# EAGLE board ELE-T305 (EAGLE 4.16)
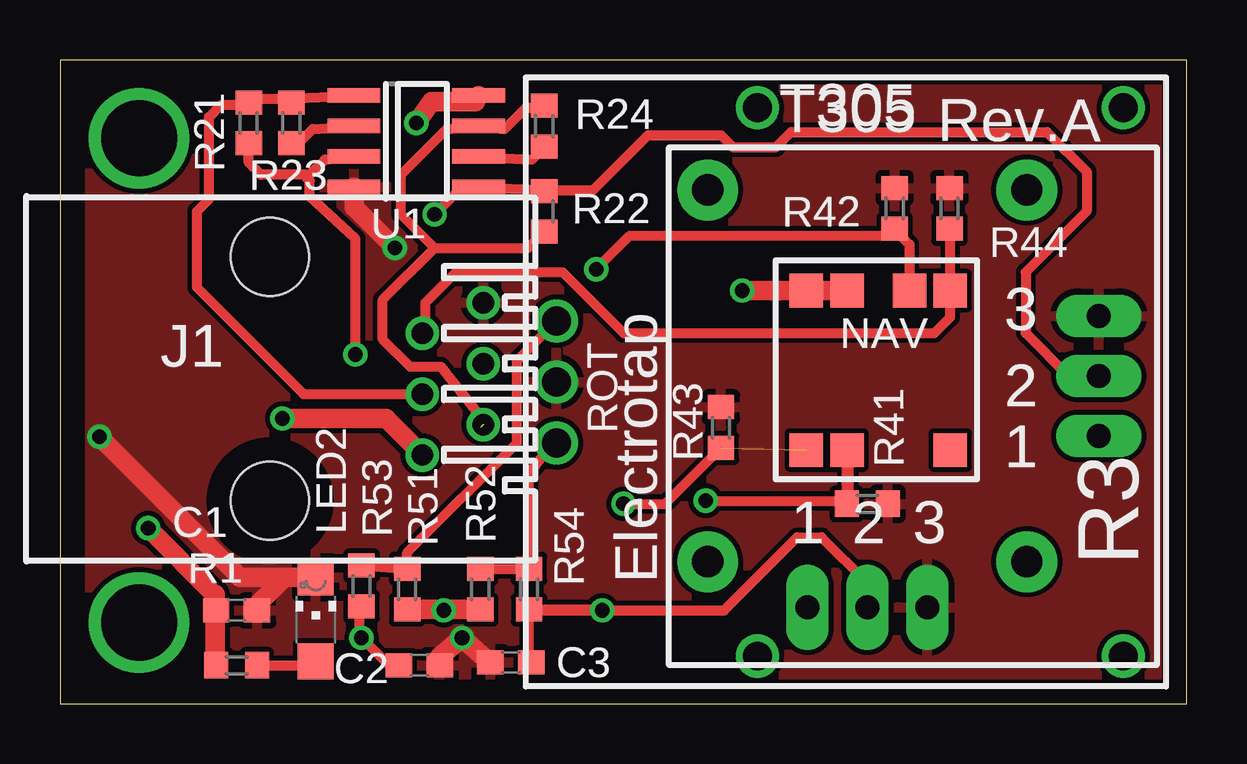
[diagram p0: board, top side]
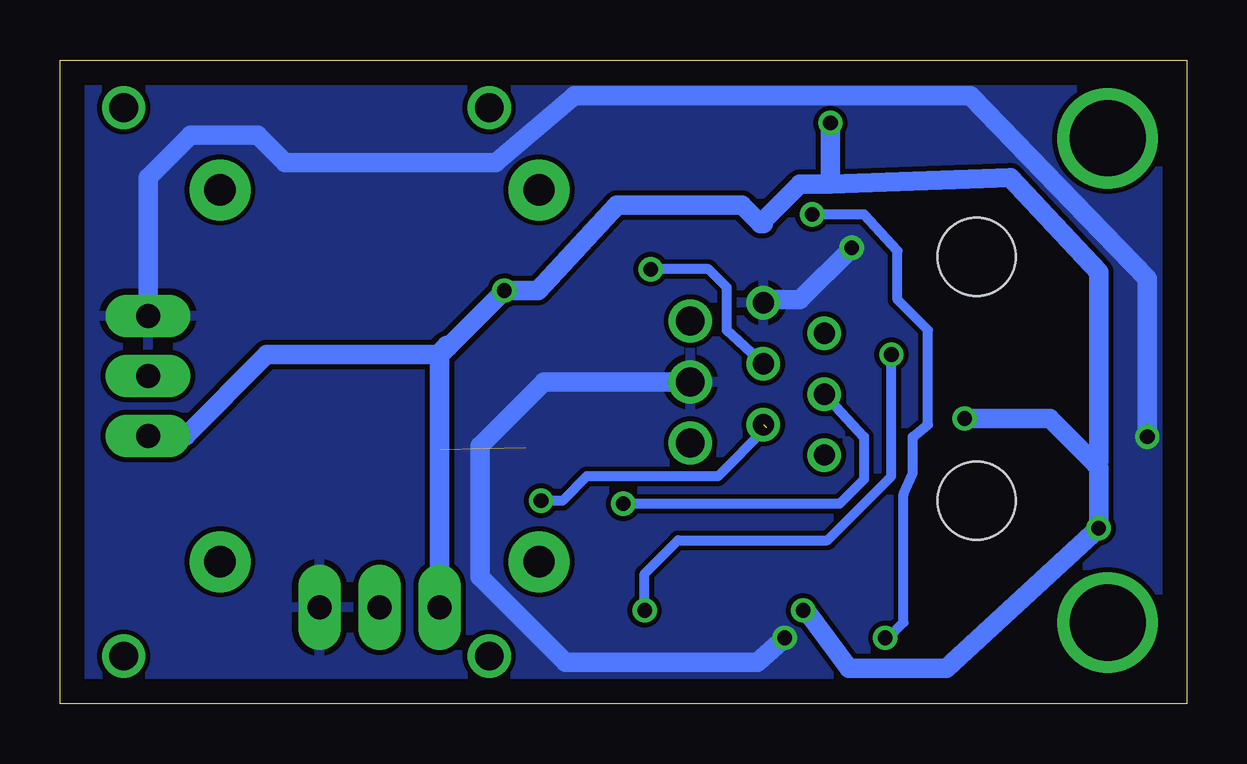
[diagram p1: board, bottom side, seen from below]

Size 46.97 x 26.85 mm. Coordinates in mm from the lower left corner, seen from the top.
Outline: 0,0 46.97,0 46.97,26.85 0,26.85 0,0
Copper layers (1*16): Top 0.035mm / dielectric 1.5mm / Bottom 0.035mm
Design rules "default": minimum track width 10mil, minimum drill 24mil, track to track 8mil, track to pad 8mil, pad to pad 8mil, via to via 8mil, smd to smd 8mil, copper to edge 40mil, drill to drill 8mil, minimum pad ring 10mil, minimum via ring 8mil, stop-mask expansion 4mil, vias tented up to drill 0mil, thermal gap 10mil

## Footprints (pad centres in the part's own frame; a part is rotated, then mirrored left to right if it is on the bottom)
C0603 = smd 1.1 x 1: 1 -0.85,0; 2 0.85,0
TELEPHONE_JACK = drill 0.889 round: 1 -3.175,8.89; 2 -1.905,6.35; 3 -0.635,8.89; 4 0.635,6.35; 5 1.905,8.89; 6 3.175,6.35 | hole 3.251: -5.08,0; 5.08,0
CHIPLED_1206 = smd 1.5 x 1.5: A 0,-1.75; C 0,1.75
SWITCH_TPA_4DIR = smd 1.4 x 1.4: 1_COMMON -3.302,-3.048; 2_COMMON -3.302,-1.348; 3_UP 3.348,-1.348; 4_DOWN 3.348,-3.048; 5_SELECT 3.348,2.952; 6_RIGHT -3.302,1.252; 7_LEFT -3.302,2.952
R0603 = smd 1 x 1.1: 1 -0.85,0; 2 0.85,0
POT_CTSJOYSTICK = drill 1 pad 1.778 long: P1-1 -2.5,-9.65; P1-2 0,-9.65; P1-3 2.5,-9.65; P2-1 9.65,-2.5; P2-2 9.65,0; P2-3 9.65,2.5 | drill 1.3 pad 2.54 round: P$7 -6.65,-7.75; P$8 6.65,-7.75; P$9 -6.65,7.75; P$10 6.65,7.75
ENCODER_BOURNS = drill 1.2 pad 1.676 round: CHANNEL_A -2.54,-12.7; CHANNEL_B 2.54,-12.7; COMMON 0,-12.7; POST_1 -11.43,10.922; POST_2 11.43,10.922; POST_3 -11.43,-4.318; POST_4 11.43,-4.318
SOIC8 = smd 0.6 x 2.2: 1 -1.905,-2.6; 2 -0.635,-2.6; 3 0.635,-2.6; 4 1.905,-2.6; 5 1.905,2.6; 6 0.635,2.6; 7 -0.635,2.6; 8 -1.905,2.6

## Placement (x,y rotation side)
C1  0.1mF  [C0603]  7.36,3.9 0 top
C2  0.01uF  [C0603]  14.98,1.61 0 top
C3  0.01uF  [C0603]  18.79,1.74 180 top
J1  [TELEPHONE_JACK]  8.76,13.55 270 top
LED2  [CHIPLED_1206]  10.66,3.52 0 top
NAV  SWITCH_TPA_4DIR_NAV  [SWITCH_TPA_4DIR]  34.16,13.93 270 top
R1  [R0603]  7.36,1.61 180 top
R3  100k  [POT_CTSJOYSTICK]  33.65,13.68 0 top
R21  Bypass  [R0603]  7.87,24.22 90 top
R22  Bypass  [R0603]  20.19,20.54 270 top
R23  [R0603]  9.65,24.22 90 top
R24  [R0603]  20.19,24.09 90 top
R41  [R0603]  33.65,8.34 180 top
R42  [R0603]  34.79,20.66 270 top
R43  [R0603]  27.55,11.52 270 top
R44  [R0603]  37.08,20.66 270 top
R51  [R0603]  14.47,4.79 270 top
R52  [R0603]  17.52,4.79 270 top
R53  [R0603]  12.57,4.92 90 top
R54  [R0603]  19.55,4.79 270 top
ROT  ENCODER_BOURNS  [ENCODER_BOURNS]  33.4,13.42 270 top
U1  AD8606  [SOIC8]  14.85,23.46 270 top

## Library data of the parts
C1-C3 J1 U1 = TEABOX-LIB
LED2 = led
NAV R3 ROT = SENSORPARTS
R1 R21-R24 R41-R44 R51-R54 = rcl

## Nets
+5V: C1.1 J1.6 NAV.1_COMMON NAV.2_COMMON R1.2 R3.P1-1 R3.P2-1 R51.2 R52.2 U1.8
GND: C1.2 C2.2 C3.2 J1.1 LED2.C R3.P1-3 R3.P2-3 R41.1 R42.1 R43.1 R44.1 ROT.COMMON U1.4
N$3: LED2.A R1.1
N$4: J1.4 NAV.4_DOWN R21.2 R23.2 R43.2 U1.1
N$5: J1.5 NAV.3_UP R22.2 R24.2 R41.2 U1.7
N$6: R24.1 U1.6
N$8: R23.1 U1.2
N$9: C3.1 R3.P1-2 R21.1 R54.2 U1.3
N$10: J1.3 NAV.6_RIGHT R42.2
N$11: R51.1 R53.2 ROT.CHANNEL_A
N$12: J1.2 NAV.7_LEFT R44.2
N$14: C2.1 R3.P2-2 R22.1 R53.1 U1.5
ROT: R52.1 R54.1 ROT.CHANNEL_B

## Tracks (layer width: path | path; a pad name or v marks a point on that pad's centre or on a via)
+5V  (via drill 0.61)
  Top 0.813: v3.68,7.33 6.47,4.53 6.47,4.57 C1.1 6.47,4.5 6.47,1.65 R1.2 | v28.44,17.23 NAV.1_COMMON NAV.2_COMMON 33.02,17.23 | R52.2 16.04,3.94 v16,3.9 15.96,3.94 R51.2 | U1.8 17.33,25.11 15.49,25.11 v14.85,24.22 | J1.6 13.58,11.9 v9.27,11.9
  Bottom 0.813: R3.P2-1 41.74,11.18 38.35,14.57 31.11,14.57 30.79,14.88 | 30.79,14.88 v28.44,17.23 27.05,17.23 23.74,20.79 18.54,20.79 17.77,20.03 17.65,20.03 17.65,20.16 16.12,21.68 14.85,21.68 | 30.79,14.88 30.86,14.95 31.15,14.65 R3.P1-1 | 14.85,21.68 7.36,21.93 3.68,18 3.68,10.12 3.8,9.99 | v16,3.9 15.87,3.9 14.09,1.49 10.03,1.49 v3.68,7.33 3.68,9.87 3.8,9.99 | 14.85,21.68 v14.85,24.22 | v9.27,11.9 5.71,11.9 3.8,9.99
GND  (via drill 0.61)
  Top 0.813: C2.2 15.83,1.96 v16.76,2.76 17.9,1.74 C3.2 | U1.4 12.25,20.72 v13.96,19.01 | C1.2 8.21,3.94 8.12,4.03 9.37,5.27 LED2.C 7.52,5.27 v1.65,11.14
  Bottom 0.813: ROT.COMMON 26.79,13.42 29.46,10.76 29.46,5.3 25.9,1.74 17.9,1.74 v16.76,2.76 | J1.1 17.77,16.85 16.12,16.85 v13.96,19.01 | v1.65,11.14 1.65,17.74 9.01,25.36 25.52,25.36 28.82,22.57 37.59,22.57 38.73,23.71 41.52,23.71 43.3,21.93 43.3,16.22 43.34,16.18 | 43.34,16.18 43.56,15.96 | 43.34,16.18 R3.P2-3
  pour Top: -0.01,26.89 46.98,26.89 46.86,-0.04 -0.13,-0.04
  pour Bottom: -0.13,26.63 46.86,26.63 46.86,-0.04 -0.13,-0.04
N$1  (via drill 3.17)
  other vias: 3.3,3.39
N$2  (via drill 3.17)
  other vias: 3.3,23.58
N$3
  Top 0.406: LED2.A 10.16,1.61 R1.1
N$4  (via drill 0.61)  (1 unrouted)
  Top 0.406: 9.39,25.23 R23.2 | 9.39,25.23 U1.1 | 27.47,10.58 27.43,10.63 27.47,10.67 R43.2 25.23,8.34 v23.49,8.34 | 9.39,25.23 8.12,25.23 7.96,25.07 R21.2 7.87,24.98 6.73,24.98 6.22,24.47 6.22,21.04 5.71,20.54 5.71,17.36 10.16,12.92 J1.4
  Bottom 0.406: v23.49,8.34 14.47,8.34 13.46,9.36 13.46,11.14 J1.4
N$5  (via drill 0.61)  (1 unrouted)
  Top 0.406: R24.2 20.15,24.94 20.06,24.85 19.43,24.85 18.54,23.96 U1.7 16.12,23.96 14.22,22.06 14.22,20.41 15.62,19.01 | J1.5 17.39,11.65 17.39,12.15 15.87,14.06 14.6,14.06 13.46,15.2 13.46,16.85 15.62,19.01 | R22.2 19.51,19.01 15.62,19.01 | R41.2 32.89,8.43 32.89,8.47 | 32.89,8.47 32.89,10.51 NAV.3_UP 32.81,8.55 32.89,8.47 | v26.92,8.47 32.89,8.47
  Bottom 0.406: v26.92,8.47 26.03,8.47 25.01,9.49 19.55,9.49 17.52,11.52
N$6
  Top 0.406: R24.1 20.19,23.2 19.68,22.7 U1.6
N$8
  Top 0.406: U1.2 10.54,23.96 10.03,23.46 9.52,23.46 9.43,23.37 R23.1
N$9  (via drill 0.61)
  Top 0.406: U1.3 11.04,22.7 10.41,22.06 10.28,22.06 | 10.28,22.06 8.38,22.06 7.87,22.57 R21.1 | C3.1 19.68,1.74 19.55,1.87 19.55,3.9 | R3.P1-2 33.65,5.04 31.74,6.95 30.73,6.95 27.68,3.9 v22.6,3.9 | 19.55,3.9 R54.2 22.56,3.94 v22.6,3.9 | 19.55,3.9 v22.6,3.9 | v12.31,14.57 12.31,19.39 10.41,21.17 10.41,21.81 10.28,21.93 10.28,22.06
  Bottom 0.406: v22.6,3.9 22.6,5.42 21.2,6.82 14.98,6.82 12.31,9.49 v12.31,14.57
N$10  (via drill 0.61)
  Top 0.406: NAV.6_RIGHT 35.41,19.16 34.79,19.77 R42.2 34.79,19.52 23.74,19.52 v22.35,18.12
  Bottom 0.406: J1.3 19.17,15.58 19.17,17.36 19.93,18.12 v22.35,18.12
N$11
  Top 0.406: 14.47,5.68 R51.1 | R53.2 14.43,5.64 14.47,5.68 | 14.47,5.68 14.47,6.31 19.04,10.88 19.04,14.31 ROT.CHANNEL_A
N$12
  Top 0.406: R44.2 37.08,19.77 37.11,19.74 NAV.7_LEFT 37.11,16.12 36.44,15.46 23.49,15.46 20.95,18 16.5,18 15.24,16.73 15.24,15.46 J1.2
N$14  (via drill 0.61)
  Top 0.406: 12.61,3.99 12.57,4.03 R53.1 12.48,3.94 12.48,2.84 v12.57,2.76 13.71,1.61 C2.1 | 20.19,21.43 U1.5 16.63,21.43 v15.62,20.41 | 20.19,21.43 20.31,21.43 20.28,21.39 R22.1 20.19,21.43 | R3.P2-2 42.03,13.68 40.25,15.46 40.25,18 42.79,20.54 42.79,22.19 41.14,23.84 30.47,23.84 29.84,23.2 28.06,23.2 27.55,23.71 24.51,23.71 22.22,21.43 20.19,21.43
  Bottom 0.406: v12.57,2.76 12.44,2.76 11.81,3.39 11.81,8.72 11.43,9.61 11.43,11.14 10.79,11.65 10.79,15.58 12.06,16.85 12.06,18.88 13.46,20.41 v15.62,20.41
ROT
  Top 0.406: R52.1 19.39,5.64 19.55,5.8 R54.1 19.55,9.61 20.57,10.88 ROT.CHANNEL_B

## Text on the board
tPlace: T305 | Rev.A | Electrotap
_tplace: R24 | T305 | R23 | Rev.A | R21 | R22 | R42 | U1 | R44 | 3 | ROT | NAV | J1 | R43 | R41 | 2 | R53 | R51 | R52 | 1 | R54 | C1 | LED2 | 1 | 2 | 3 | R1 | R3 | Electrotap | C3 | C2